# EAGLE board MiniBoard (EAGLE 9.6.2)
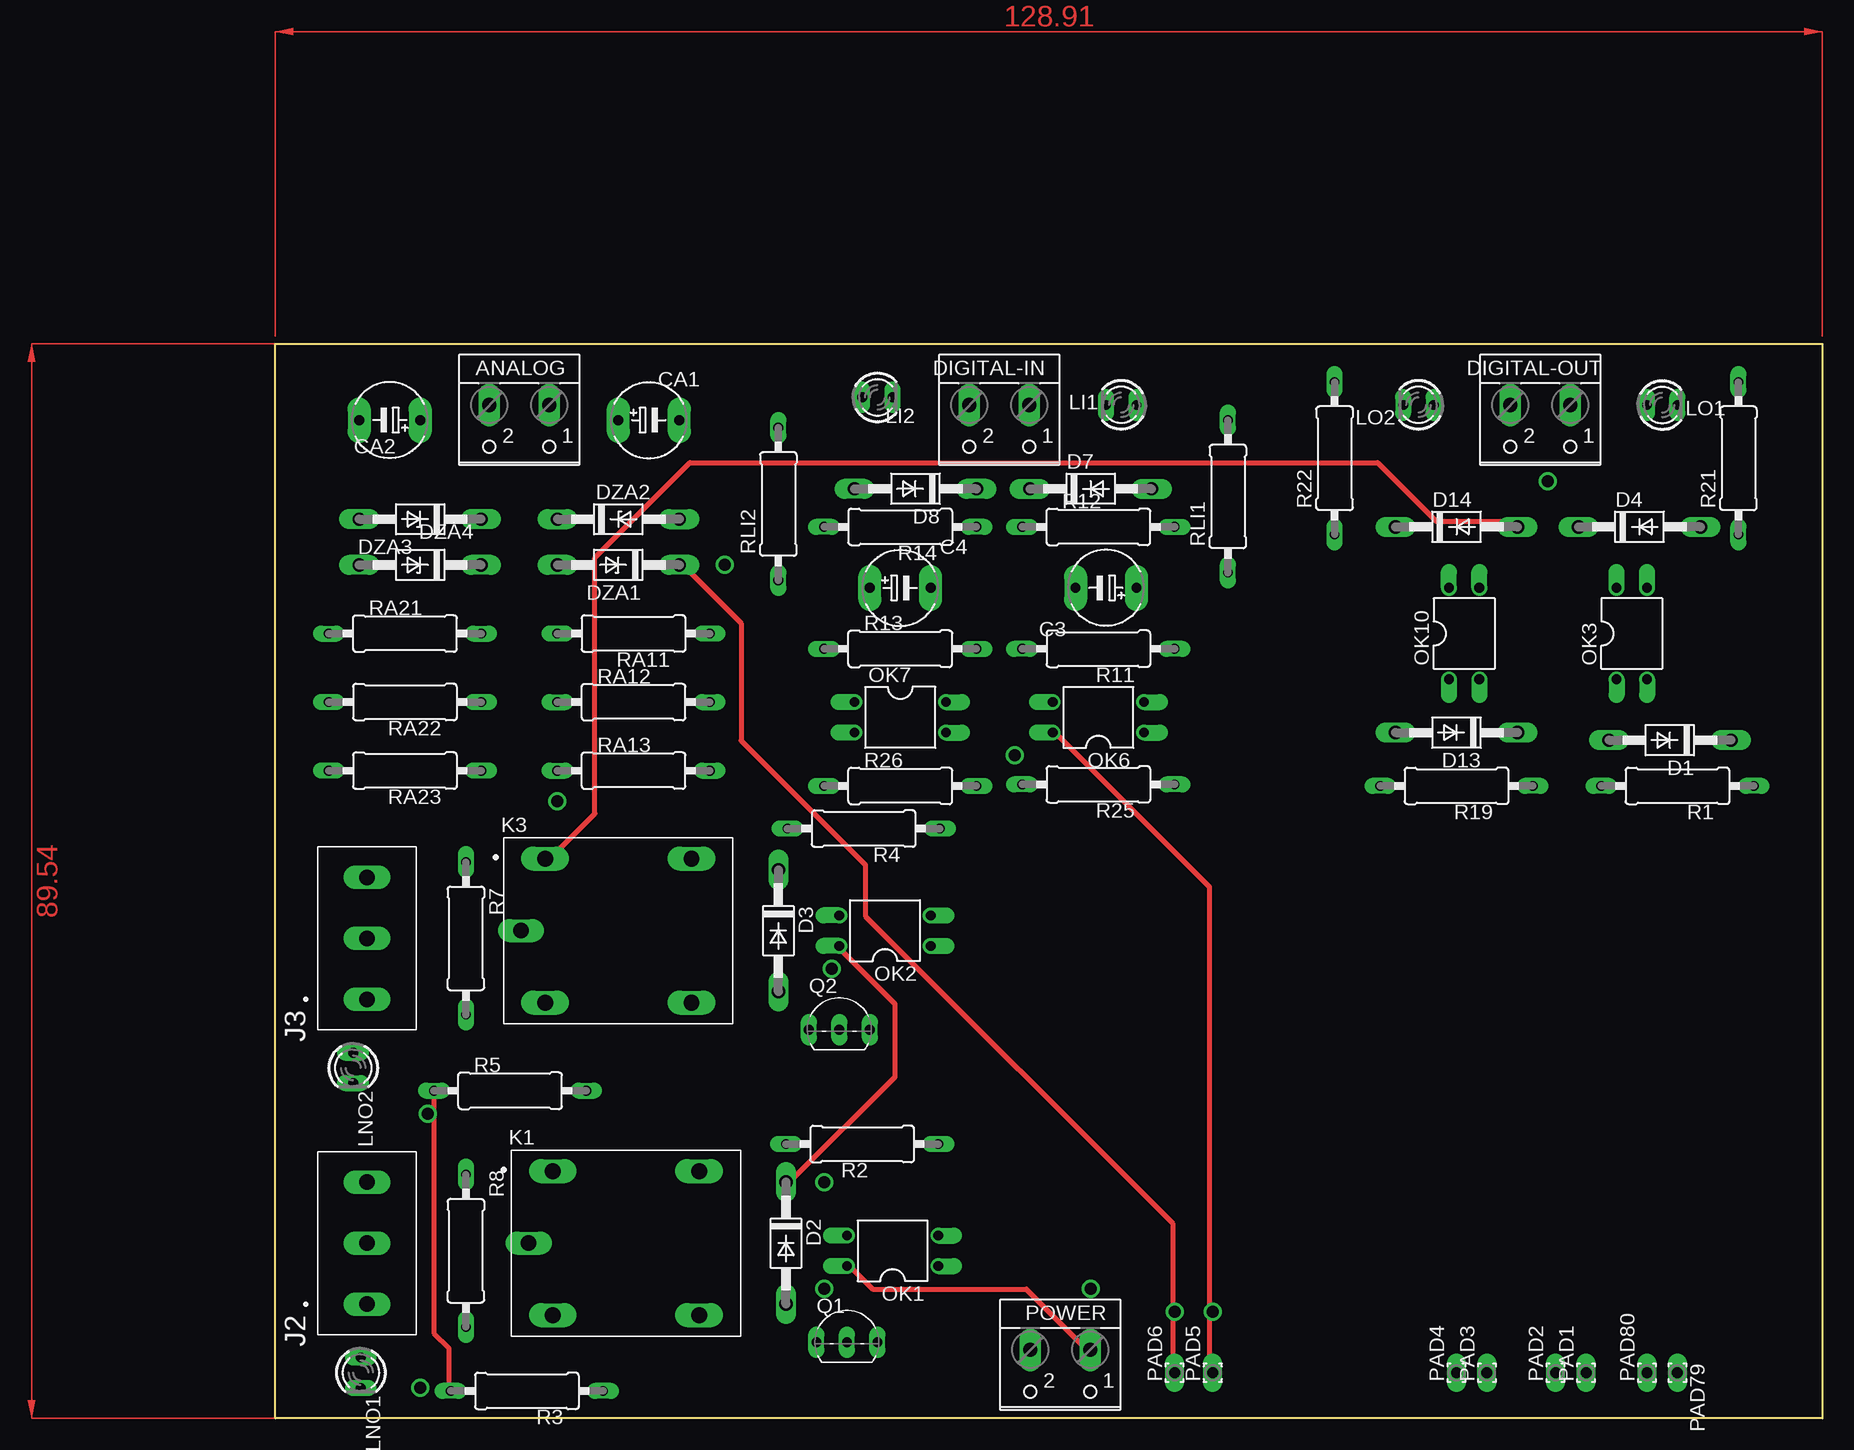
[diagram p0: board, top side]
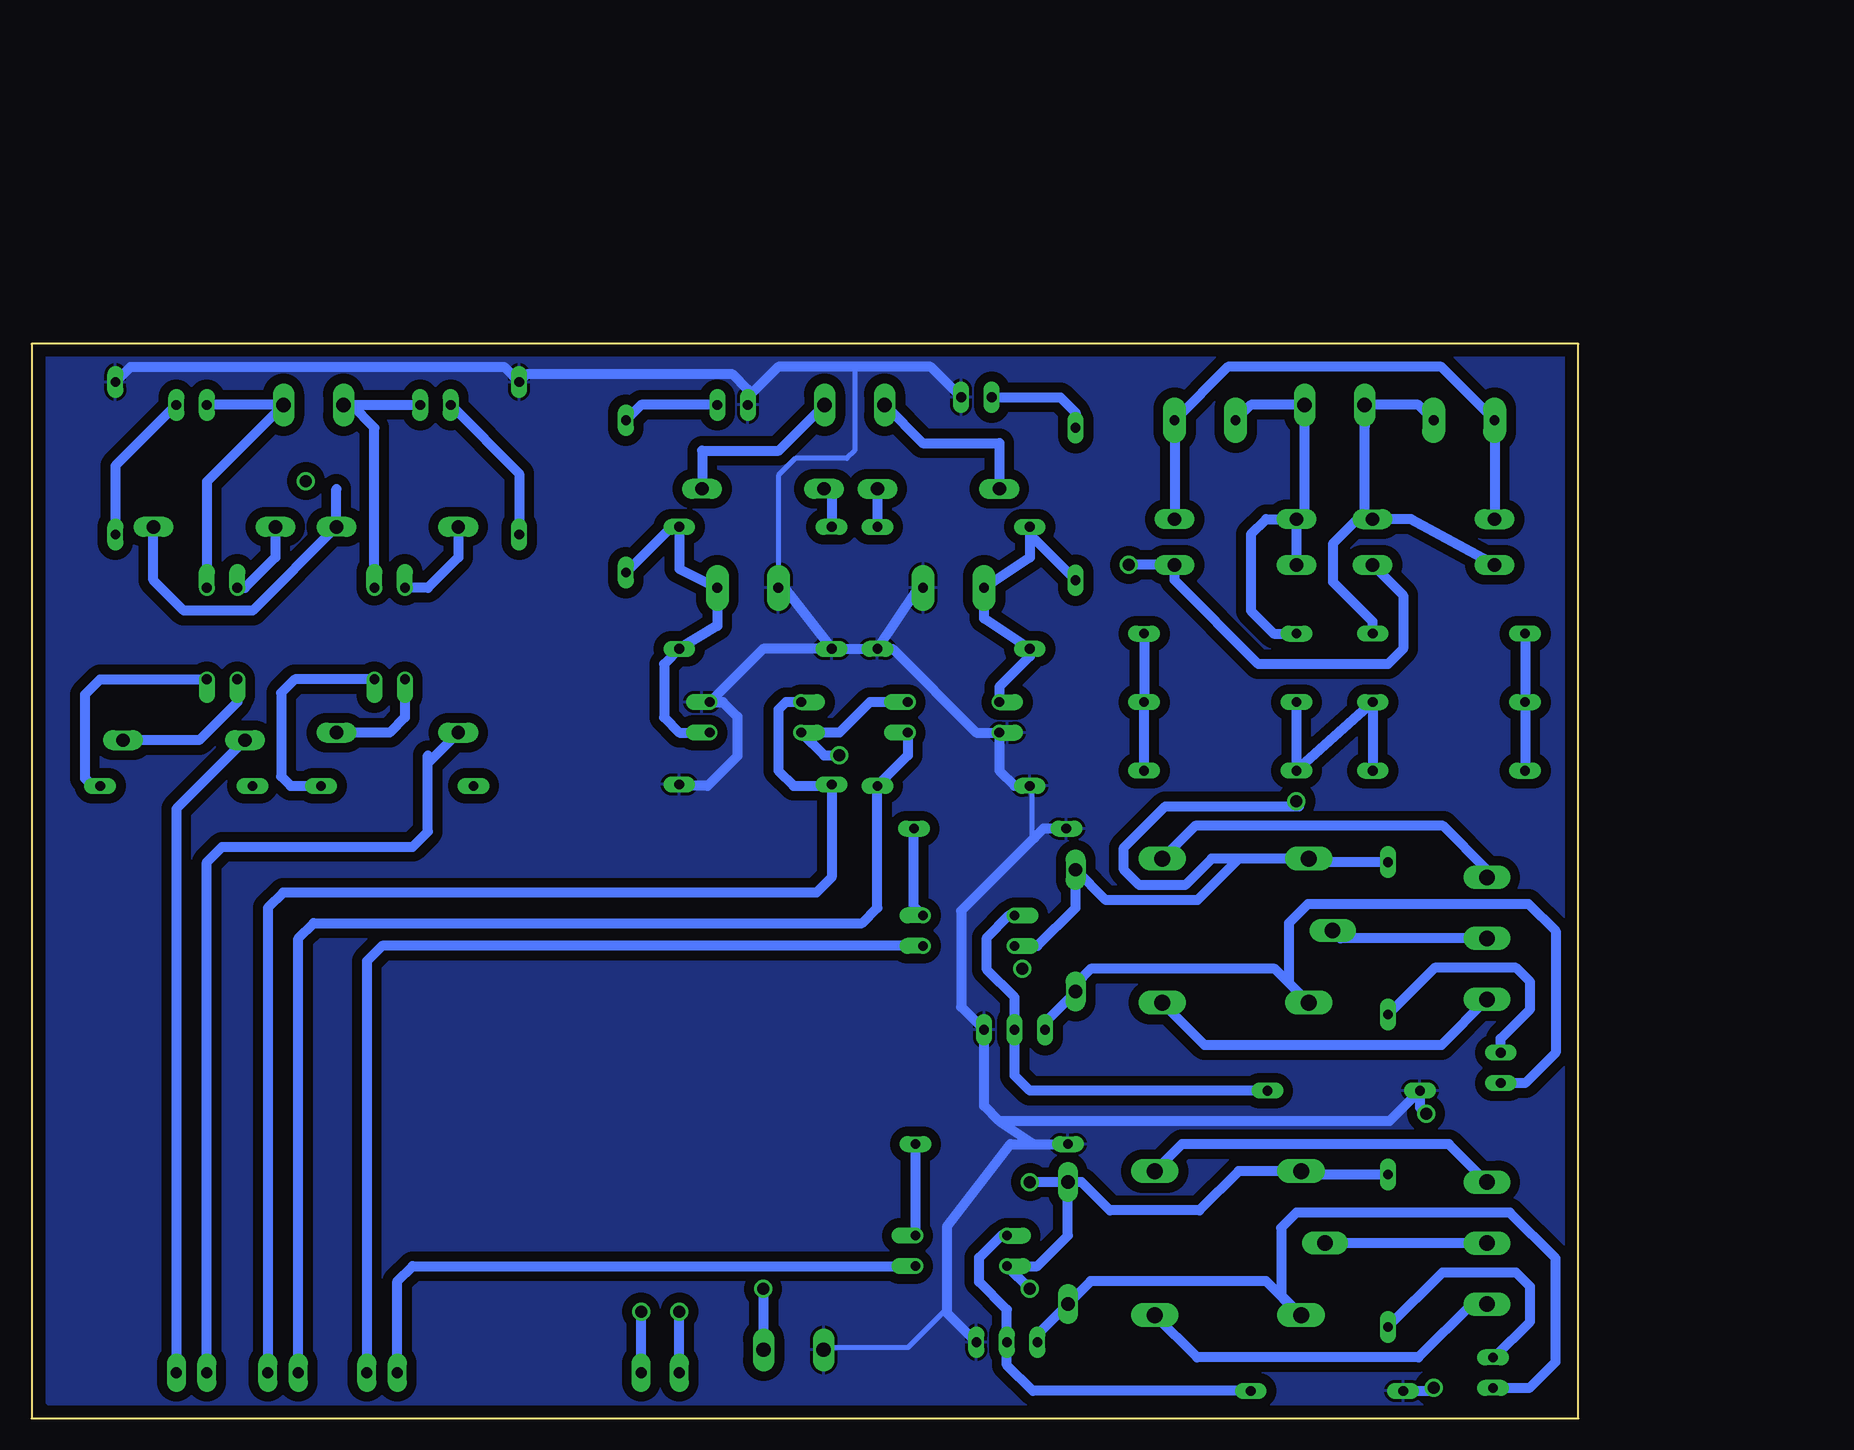
[diagram p1: board, bottom side, seen from below]

Size 128.91 x 89.54 mm. Coordinates in mm from the lower left corner, seen from the top.
Outline: 0,89.54 128.91,89.54 128.91,0 0,0 0,89.54
Copper layers (1*16): Top 0.035mm / dielectric 1.5mm / Bottom 0.035mm
Design rules "default *": minimum track width 16mil, minimum drill 0.35mm, track to track 32mil, track to pad 32mil, pad to pad 32mil, via to via 32mil, smd to smd 6mil, copper to edge 40mil, drill to drill 6mil, minimum pad ring 10mil, minimum via ring 8mil, stop-mask expansion 4mil, vias tented up to drill 0mil, thermal gap 10mil

## Footprints (pad centres in the part's own frame; a part is rotated, then mirrored left to right if it is on the bottom)
W237-102 = drill 1.194 long: 1 -2.5,-1.27; 2 2.5,-1.27
E5-6 = drill 0.813 pad 1.905 long: + -2.54,0; - 2.54,0
DO41-10 = drill 1.118 long: A 5.08,0; C -5.08,0
DO41Z10 = drill 1.118 long: A 5.08,0; C -5.08,0
CUI_TB006-508-03BE = drill 1.3 long: 1 0,0; 2 5.08,0; 3 10.16,0
RELAY_SRD-05VDC-SL-C = drill 1.32 long: A1 -6.1,6; A2 -6.1,-6; NC 6.1,6; NO 6.1,-6 | drill 1.29 long: COM -8.1,0
LED3MM = drill 0.813 long: A -1.27,0; K 1.27,0
DIL04 = drill 0.813 offset: 1 -1.27,-3.81; 2 1.27,-3.81; 3 1.27,3.81; 4 -1.27,3.81
1,6/0,9 = drill 0.914 pad 1.6 long: 1 0,0
TO92-EBC = drill 0.813 long: B 0,-1.27; C -2.54,-1.27; E 2.54,-1.27
0309/12 = drill 0.813 long: 1 -6.35,0; 2 6.35,0

## Placement (x,y rotation side)
ANALOG  [W237-102]  20.32,83.19 180 top
C3  100n  [E5-6]  69.22,69.22 180 top
C4  100n  [E5-6]  52.07,69.22 0 top
CA1  100n  [E5-6]  31.12,83.19 0 top
CA2  100n  [E5-6]  9.53,83.19 180 top
D1  1N4004  [DO41-10]  116.2,56.52 180 top
D2  1N4004  [DO41-10]  42.55,14.61 270 top
D3  1N4004  [DO41-10]  41.91,40.64 270 top
D4  1N4004  [DO41-10]  113.67,74.3 0 top
D7  1N4004  [DO41-10]  67.95,77.47 0 top
D8  1N4004  [DO41-10]  53.34,77.47 180 top
D13  1N4004  [DO41-10]  98.42,57.15 180 top
D14  1N4004  [DO41-10]  98.42,74.3 0 top
DIGITAL-IN  [W237-102]  60.33,83.19 180 top
DIGITAL-OUT  [W237-102]  105.41,83.19 180 top
DZA1  1N4728  [DO41Z10]  28.58,71.12 180 top
DZA2  1N4728  [DO41Z10]  28.58,74.93 0 top
DZA3  1N4728  [DO41Z10]  12.06,71.12 180 top
DZA4  1N4728  [DO41Z10]  12.06,74.93 180 top
J2  WAGO-03BE  [CUI_TB006-508-03BE]  7.62,9.53 90 top
J3  WAGO-03BE  [CUI_TB006-508-03BE]  7.62,34.92 90 top
K1  SRD-05VDC-SL-C  [RELAY_SRD-05VDC-SL-C]  29.21,14.61 0 top
K3  SRD-05VDC-SL-C  [RELAY_SRD-05VDC-SL-C]  28.58,40.64 0 top
LI1  [LED3MM]  70.48,84.45 180 top
LI2  [LED3MM]  50.16,85.09 0 top
LNO1  [LED3MM]  7.11,3.81 270 top
LNO2  [LED3MM]  6.48,29.21 270 top
LO1  [LED3MM]  115.57,84.45 0 top
LO2  [LED3MM]  95.25,84.45 180 top
OK1  PC817  [DIL04]  51.44,13.97 90 top
OK2  PC817  [DIL04]  50.8,40.64 90 top
OK3  PC817  [DIL04]  113.03,65.41 0 top
OK6  PC817  [DIL04]  68.58,58.42 90 top
OK7  PC817  [DIL04]  52.07,58.42 270 top
OK10  PC817  [DIL04]  99.06,65.41 0 top
PAD1  WIREPAD1,6/0,9  [1,6/0,9]  109.22,3.81 90 top
PAD2  WIREPAD1,6/0,9  [1,6/0,9]  106.68,3.81 90 top
PAD3  WIREPAD1,6/0,9  [1,6/0,9]  100.97,3.81 90 top
PAD4  WIREPAD1,6/0,9  [1,6/0,9]  98.42,3.81 90 top
PAD5  WIREPAD1,6/0,9  [1,6/0,9]  78.11,3.81 90 top
PAD6  WIREPAD1,6/0,9  [1,6/0,9]  74.93,3.81 90 top
PAD79  WIREPAD1,6/0,9  [1,6/0,9]  116.84,3.81 270 top
PAD80  WIREPAD1,6/0,9  [1,6/0,9]  114.3,3.81 90 top
POWER  [W237-102]  65.41,4.45 180 top
Q1  BC338  [TO92-EBC]  47.62,7.62 0 top
Q2  BC338  [TO92-EBC]  46.99,33.66 0 top
R1  220  [0309/12]  116.84,52.7 180 top
R2  220  [0309/12]  48.9,22.86 180 top
R3  2K  [0309/12]  20.95,2.29 180 top
R4  220  [0309/12]  49.02,49.15 180 top
R5  2K  [0309/12]  19.56,27.31 0 top
R7  2K  [0309/12]  15.87,40.01 270 top
R8  2K  [0309/12]  15.87,13.97 270 top
R11  470  [0309/12]  68.58,64.14 180 top
R12  2K  [0309/12]  68.58,74.3 0 top
R13  470  [0309/12]  52.07,64.14 0 top
R14  2K  [0309/12]  52.07,74.3 180 top
R19  220  [0309/12]  98.42,52.7 180 top
R21  [0309/12]  121.92,80.01 90 top
R22  [0309/12]  88.27,80.01 90 top
R25  180  [0309/12]  68.58,52.83 180 top
R26  180  [0309/12]  52.07,52.7 0 top
RA11  100K  [0309/12]  29.84,65.41 180 top
RA12  10K  [0309/12]  29.84,59.69 0 top
RA13  1K  [0309/12]  29.84,53.98 0 top
RA21  100K  [0309/12]  10.79,65.41 0 top
RA22  10K  [0309/12]  10.79,59.69 180 top
RA23  1K  [0309/12]  10.79,53.98 180 top
RLI1  [0309/12]  79.38,76.84 90 top
RLI2  [0309/12]  41.91,76.2 90 top

## Library data of the parts
ANALOG DIGITAL-IN DIGITAL-OUT POWER = con-wago-500; MPN: 237-102; OC_FARNELL: unknown; OC_NEWARK: 70K9898
C3 C4 CA1 CA2 = rcl-ws; SPICEPREFIX: C
D1-D4 D7 D8 D13 D14 = diode
DZA1-DZA4 = diode-ws
J2 J3 = TB006-508-03BE; AVAILABILITY: In Stock; CHECK_PRICES: https://www.snapeda.com/parts/TB006-508-03BE/Same+Sky/view-part/?ref=eda; DESCRIPTION: 2~24 Poles, Screw Type, Horizontal, 5.08 Pitch, 26~14 (AWG), Terminal Block Connector; MF: Same Sky; MP: TB006-508-03BE; PACKAGE: None; PRICE: None; SNAPEDA_LINK: https://www.snapeda.com/parts/TB006-508-03BE/Same+Sky/view-part/?ref=snap
K1 K3 = SRD-05VDC-SL-C; AVAILABILITY: In Stock; CHECK_PRICES: https://www.snapeda.com/parts/SRD-05VDC-SL-C/Songle+Relay/view-part/?ref=eda; DESCRIPTION: 5V Trigger Relay Module For Arduino And Raspberry Pi 5V Trigger Relay Module For Arduino And Raspberry Pi; MF: Songle Relay; MP: SRD-05VDC-SL-C; PACKAGE: NON STANDARD-5 Songle Relay; PRICE: None; SNAPEDA_LINK: https://www.snapeda.com/parts/SRD-05VDC-SL-C/Songle+Relay/view-part/?ref=snap
LI1 LI2 LNO1 LNO2 LO1 LO2 = led_WS
OK1-OK3 OK6 OK7 OK10 = optocoupler; MPN: PC817X4J000F; OC_FARNELL: 9707727; OC_NEWARK: 97K7059
PAD1-PAD6 PAD79 PAD80 = wirepad-ws
Q1 Q2 = transistor-npn
R1-R5 R7 R8 R11-R14 R19 R21 R22 R25 R26 RA11-RA13 RA21-RA23 RLI1 RLI2 = rcl-ws; SPICEPREFIX: R

## Nets
3V3: OK6.4 OK7.4 PAD5.1
5V: DZA1.C DZA3.C PAD6.1
12V: D2.C D3.C D4.A D14.A K1.A1 K3.A1 OK1.4 OK2.4 POWER.1 R7.1 R8.1
A1: RA11.1 RA12.2 RA13.2
A2: RA21.1 RA22.2 RA23.2
AI1: ANALOG.1 CA1.+ DZA1.A DZA2.C RA11.2
AI2: ANALOG.2 CA2.+ DZA3.A DZA4.C RA21.2
COM1: J2.2 K1.COM
COM2: J3.2 K3.COM
GND: C3.- C4.- LI1.K LI2.K OK6.2 OK7.2 POWER.2 Q1.E Q2.E R2.2 R3.2 R4.2 R5.1 R11.2 R13.2 R21.2 R22.2 R25.1 R26.1
IN1: D7.A DIGITAL-IN.1
IN2: D8.A DIGITAL-IN.2
N$1: OK2.2 R4.1
N$2: OK1.2 R2.1
N$3: OK1.3 Q1.B R3.1
N$4: D3.A K3.A2 LNO2.K Q2.C
N$6: OK2.3 Q2.B R5.2
N$7: LNO2.A R7.2
N$10: LNO1.A R8.2
N$11: D2.A K1.A2 LNO1.K Q1.C
N$15: D1.C OK3.1
N$16: OK3.2 R1.1
N$18: D4.C OK3.4
N$19: C3.+ OK6.1 R11.1 R12.2 RLI1.1
N$20: D7.C R12.1
N$21: C4.+ OK7.1 R13.1 R14.2 RLI2.1
N$22: D8.C R14.1
N$24: LI2.A RLI2.2
N$26: D13.C OK10.1
N$27: OK10.2 R19.1
N$29: LI1.A RLI1.2
N$30: LO1.K R21.1
N$31: LO2.K R22.1
N$34: RA12.1 RA13.1 RA22.1 RA23.1
N$35: CA1.- CA2.- DZA2.A DZA4.A
N$52: D14.C OK10.4
NC1: J2.3 K1.NC
NC2: J3.3 K3.NC
NO1: J2.1 K1.NO
NO2: J3.1 K3.NO
OUT1: DIGITAL-OUT.1 LO1.A OK3.3
OUT2: DIGITAL-OUT.2 LO2.A OK10.3
R1: D1.A PAD79.1
R2: D13.A PAD80.1
RR1: OK1.1 PAD4.1
RR2: OK2.1 PAD3.1
S1: OK6.3 PAD1.1 R25.2
S2: OK7.3 PAD2.1 R26.2

## Tracks (layer width: path | path; a pad name or v marks a point on that pad's centre or on a via)
3V3
  Top 0.406: PAD5.1 77.83,4.06 77.83,44.3 65.02,57.1 OK6.4
  Bottom 0.813: OK7.4 59.06,59.69 61.59,57.15 OK6.4 62.86,55.25 61.59,55.25 | PAD5.1 78.11,8.89
5V
  Top 0.406: PAD6.1 74.78,4.06 74.78,16.26 49.17,41.86 49.17,46.13 38.81,56.49 38.81,66.24 33.93,71.12 DZA1.C
  Bottom 0.813: DZA3.C 14.6,68.58 14.6,64.14 15.87,62.87 26.67,62.87 33.66,69.85 DZA1.C 37.47,71.12 | PAD6.1 74.93,8.89
12V  (via drill 0.35)
  Top 0.406: POWER.1 67.46,5.89 62.59,10.77 49.78,10.77 47.95,12.6 OK1.4 | D14.A 103.43,74.78 96.72,74.78 91.85,79.65 34.54,79.65 26.62,71.73 26.62,50.39 22.96,46.74 K3.A1 | D2.C 43.08,19.91 51.61,28.45 51.61,34.54 47.35,38.81 OK2.4
  Bottom 0.813: R7.1 22.19,46.36 K3.A1 | K3.A1 28.29,46.64 31.75,43.18 39.37,43.18 D3.C 41.91,42.55 45.09,39.37 OK2.4 | R8.1 22.83,20.32 K1.A1 28.31,20.61 31.58,17.33 39.04,17.33 41.39,19.69 D2.C | D2.C 42.55,15.24 45.09,12.7 OK1.4 45.72,10.8 | D4.A 118.75,69.85 116.2,67.31 110.49,67.31 D14.A 103.5,77.47 | 23.29,51 34.43,51 37.87,47.56 37.87,45.73 36.58,44.43 32.77,44.43 30.56,46.64 K3.A1 | POWER.1 67.91,10.76 67.95,10.8 | D2.C 45.72,19.69
  other vias: 46.99,39.37
A1
  Bottom 0.813: RA11.1 RA12.2 RA13.2
A2
  Bottom 0.813: RA21.1 RA22.2 RA23.2
AI1
  Bottom 0.813: DZA2.C 26.03,74.93 27.3,73.66 27.3,67.31 25.4,65.41 RA11.2 | CA1.+ 27.3,84.45 ANALOG.1 22.82,75.61 DZA2.C | DZA2.C DZA1.A
AI2
  Bottom 0.813: ANALOG.2 17.82,82.59 | DZA3.A 13.97,74.93 DZA4.C | RA21.2 17.15,66.39 20.47,69.72 20.47,72.87 18.41,74.93 DZA4.C | ANALOG.2 17.82,75.61 DZA4.C | CA2.+ 13.33,84.45 ANALOG.2
COM1
  Bottom 0.813: J2.2 K1.COM
COM2
  Bottom 0.813: J3.2 19.84,40.01 K3.COM
GND
  Top 0.406: R5.1 13.21,7.11 14.43,5.89 14.43,2.85 R3.2
  Bottom 0.406: 60.33,87.63 60.33,80.64 60.96,80.01 65.26,80.01 66.67,78.59 C3.- | POWER.2 62.59,5.89 55.88,5.89 52.83,8.94 52.63,8.94 | R26.1 45.52,52.22 45.52,48.56 45.34,48.39
  Bottom 0.813: R11.2 R13.2 | R25.1 75.06,52.7 72.56,52.7 70.08,55.19 70.08,58.48 71.29,59.69 OK6.2 67.95,64.14 R11.2 | Q1.E 52.63,8.81 52.63,8.94 52.63,15.95 47.33,22.86 R2.2 45.4,22.86 48.26,24.77 | R4.2 44.58,49.15 45.34,48.39 51.44,42.29 51.44,34.29 Q2.E 49.53,26.03 48.26,24.77 | 48.26,24.77 15.75,24.77 R5.1 13.21,25.91 12.7,25.4 | C4.- 55.2,68.97 R13.2 | C3.- 66.06,69.06 R11.2 | R13.2 57.15,64.14 50.16,57.15 OK7.2 48.26,53.98 46.99,52.7 R26.1 | LI2.K 53.98,87.63 60.33,87.63 66.67,87.63 69.22,85.09 LI1.K 69.22,85.73 70.48,86.99 87.63,86.99 R22.2 89.53,87.63 120.65,87.63 R21.2 | R3.2 12.32,2.29 12.06,2.54
  pour Bottom: 1.27,89.54 127,89.54 128.27,88.27 128.27,1.91 127,0.64 1.91,0.64 0,2.54 0,3.81 0,88.27
IN1
  Bottom 0.813: DIGITAL-IN.1 66.64,80.64 73.03,80.64 D7.A
IN2
  Bottom 0.813: DIGITAL-IN.2 54.65,81.28 48.26,81.28 D8.A
N$1
  Bottom 0.813: OK2.2 55.37,42.67 R4.1
N$2
  Bottom 0.813: R2.1 OK1.2
N$3
  Bottom 0.813: R3.1 45.47,2.29 47.62,4.45 Q1.B 47.62,9.06 49.94,11.37 49.94,13.39 48.09,15.24 OK1.3
N$4
  Bottom 0.813: K3.A2 24.13,36.3 | 24.13,36.3 24.13,41.28 22.52,42.88 4.17,42.88 1.91,40.62 1.91,30.48 4.45,27.94 LNO2.K | 24.13,36.3 25.3,37.47 40.64,37.47 41.91,36.2 D3.A 44.45,33.02 Q2.C
N$5  (via drill 1 pad 0.85)
  other vias: 78.11,8.89
N$6
  Bottom 0.813: R5.2 45.72,27.31 46.99,28.58 Q2.B 46.99,35.09 49.3,37.41 49.3,40.06 47.46,41.91 OK2.3
N$7
  Bottom 0.813: LNO2.A 6.48,31.64 4.02,34.1 4.02,36.39 5.19,37.55 11.98,37.55 R7.2
N$8  (via drill 1 pad 0.85)
  other vias: 74.93,8.89
N$9  (via drill 1 pad 0.85)
  other vias: 67.95,10.8
N$10
  Bottom 0.813: LNO1.A 7,5.08 4.02,8.07 4.02,10.98 5.19,12.15 11.34,12.15 R8.2
N$11
  Bottom 0.813: LNO1.K 4.12,2.54 4.1,2.52 1.91,4.72 1.91,13.34 5.71,17.14 23.49,17.14 24.77,15.88 24.77,10.26 K1.A2 23.21,8.61 26.03,11.43 40.64,11.43 D2.A 45.09,6.98 Q1.C
N$12  (via drill 1 pad 0.85)
  other vias: 45.72,10.8
N$13  (via drill 1 pad 0.85)
  other vias: 12.06,2.54
N$14  (via drill 1 pad 0.85)
  other vias: 12.7,25.4
N$15
  Bottom 0.813: OK3.1 111.76,59.69 114.94,56.52 D1.C
N$16
  Bottom 0.813: R1.1 123.83,52.7 124.46,53.34 124.46,60.33 123.19,61.59 OK3.2
N$17  (via drill 1 pad 0.85)
  other vias: 23.49,51.44
N$18
  Bottom 0.813: OK3.4 111.12,69.22 108.59,71.76 D4.C
N$19
  Bottom 0.813: RLI1.1 75.56,74.3 R12.2 74.93,70.8 C3.+ 71.75,66.04 R11.1 76.2,62.87 76.2,58.42 74.93,57.15 OK6.1
N$20
  Bottom 0.813: D7.C 62.23,76.84 R12.1
N$21
  Bottom 0.813: RLI2.1 45.72,73.66 R14.2 45.72,71.76 C4.+ 49.53,66.67 R13.1 45.72,63.5 48.26,60.96 OK7.1
N$22
  Bottom 0.813: D8.C R14.1
N$23  (via drill 1 pad 0.85)
  other vias: 106.05,78.11
N$24
  Bottom 0.813: LI2.A 43.18,85.09 41.91,83.82 RLI2.2
N$25  (via drill 1 pad 0.85)
  other vias: 37.47,71.12
N$26
  Bottom 0.813: OK10.1 97.79,58.42 99.06,57.15 D13.C
N$27
  Bottom 0.813: OK10.2 106.97,61.59 108.1,60.46 108.1,53.49 107.31,52.7 R19.1
N$28  (via drill 1 pad 0.85)
  other vias: 61.59,55.25
N$29
  Bottom 0.813: LI1.A 78.11,84.45 RLI1.2
N$30
  Bottom 0.813: LO1.K 121.92,79.38 R21.1
N$31
  Bottom 0.813: LO2.K 88.27,78.74 R22.1
N$32  (via drill 1 pad 0.85)
  other vias: 45.72,19.69
N$33  (via drill 1 pad 0.85)
  other vias: 46.36,37.47
N$34
  Bottom 0.813: RA12.1 RA13.1 RA22.1 RA23.1
N$35
  Bottom 0.813: CA1.- 33.98,83.19 | CA1.- DZA2.A | CA1.- 29.21,87.63 11.43,87.63 CA2.- DZA4.A
N$52
  Bottom 0.813: D14.C 93.34,71.76 95.89,69.22 OK10.4
NC1
  Bottom 0.813: K1.NC 33.05,22.86 10.79,22.86 J2.3
NC2
  Bottom 0.813: J3.3 7.62,45.72 11.28,49.38 31.94,49.38 K3.NC
NO1
  Bottom 0.813: J2.1 8.89,9.53 13.33,5.08 31.79,5.08 K1.NO
NO2
  Bottom 0.813: K3.NO 31.15,31.12 11.43,31.12 J3.1
OUT1
  Bottom 0.813: OK3.3 114.3,78.07 DIGITAL-OUT.1 LO1.A
OUT2
  Bottom 0.813: OK10.3 100.33,82.55 102.23,84.45 DIGITAL-OUT.2 LO2.A
R1
  Bottom 0.813: D1.A 116.84,50.8 PAD79.1
R2
  Bottom 0.813: PAD80.1 114.3,46.36 113.03,47.62 97.16,47.62 95.89,48.89 95.89,54.61 | 95.89,54.61 95.89,55.25 | 95.89,54.61 D13.A
RR1
  Bottom 0.813: PAD4.1 98.42,11.43 97.16,12.7 OK1.1
RR2
  Bottom 0.813: OK2.1 99.7,39.37 100.97,38.1 PAD3.1
S1
  Bottom 0.813: R25.2 62.1,52.83 | OK6.3 66.04,59.69 66.67,59.06 66.67,53.98 65.41,52.7 62.36,52.7 R25.2 | PAD1.1 109.22,42.55 107.95,43.81 63.5,43.81 62.23,45.09 R25.2
S2
  Bottom 0.813: OK7.3 55.88,55.25 R26.2 58.42,42.55 59.69,41.28 105.41,41.28 106.68,40.01 PAD2.1
(copper drawn outside any net)
  shapes: Top area x2